# Altium PCB 飞控-REV.PcbDoc
Units mil, origin at the board's own origin, x right, y up, seen from the top; angles counter-clockwise.
Board outline 1771.65 x 1322.83 mil, 4 copper layers (Top Layer, GND, VCC, Bottom Layer), stack 30.634 mil thick; 76 components, 111 nets, 377 pads, 138 vias.
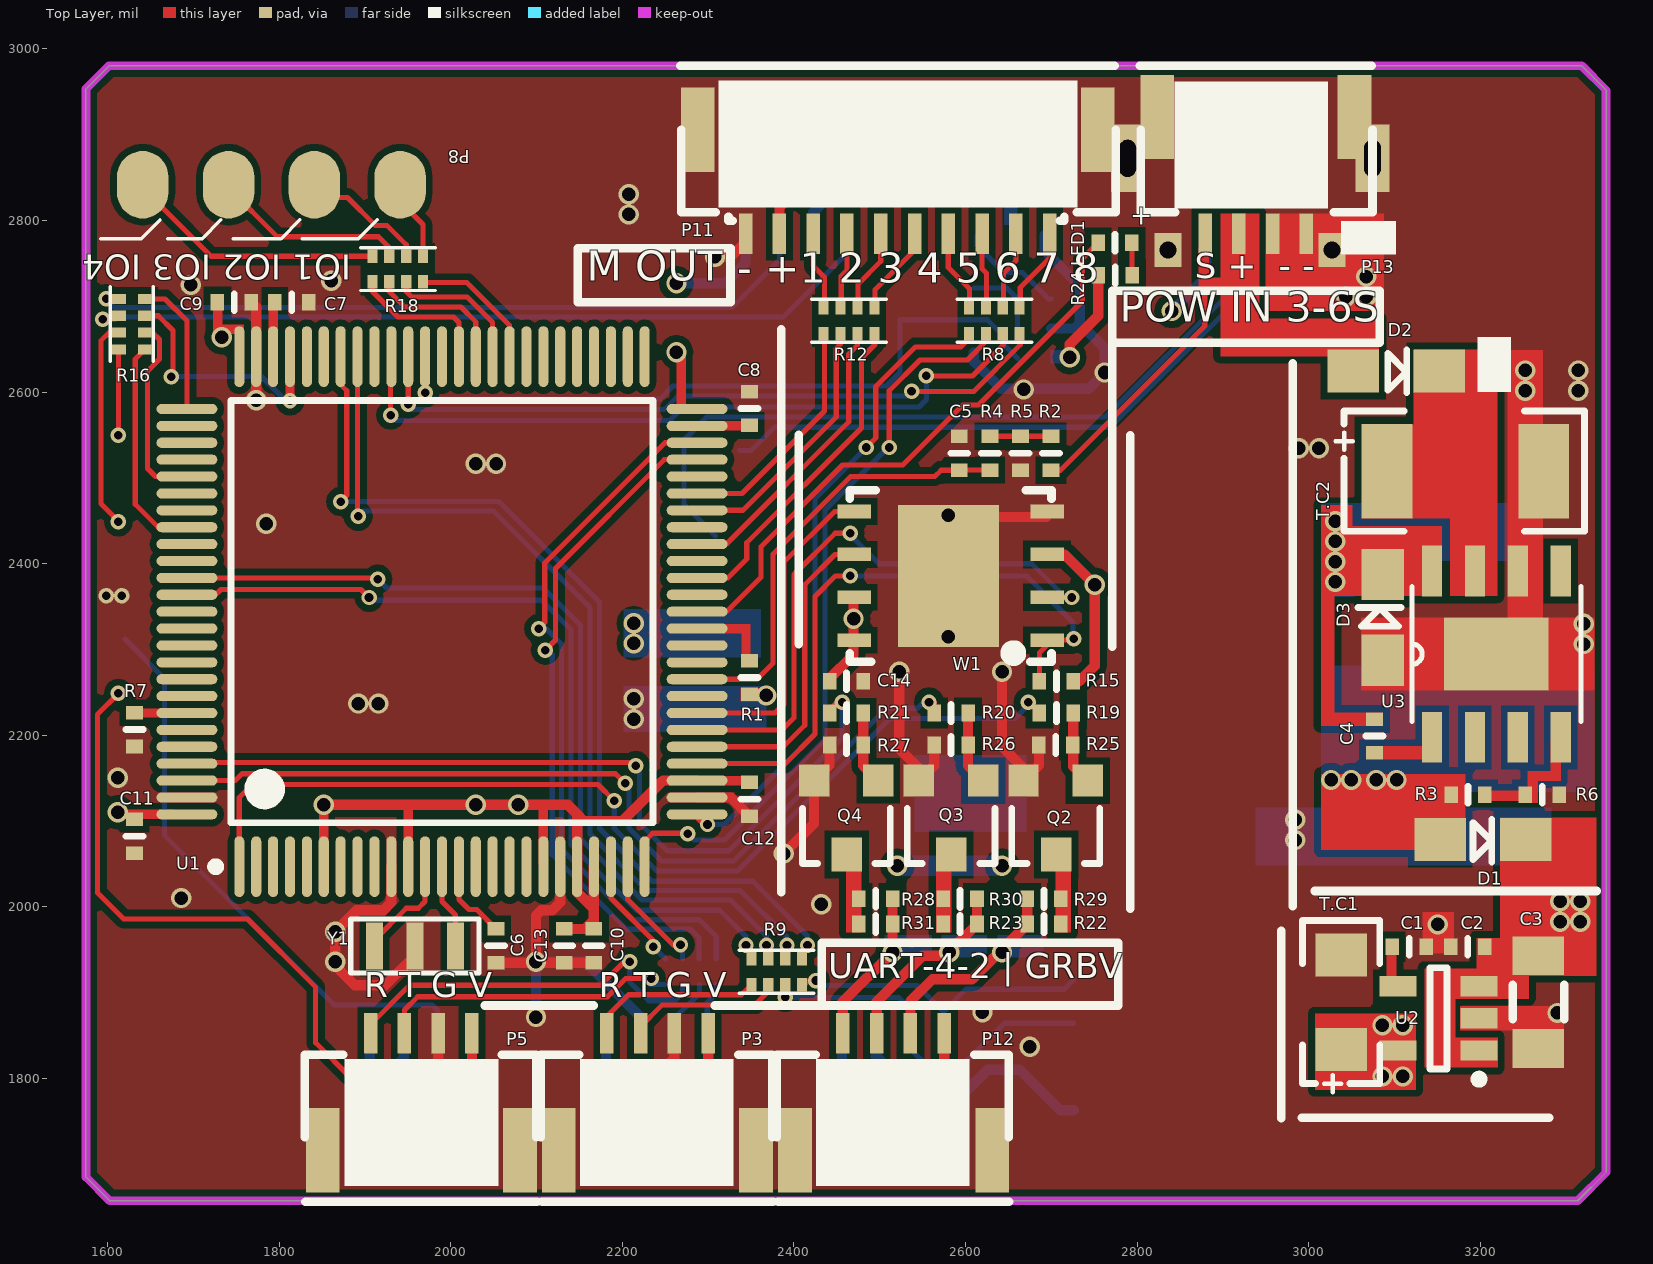
[diagram p0: Top Layer view]
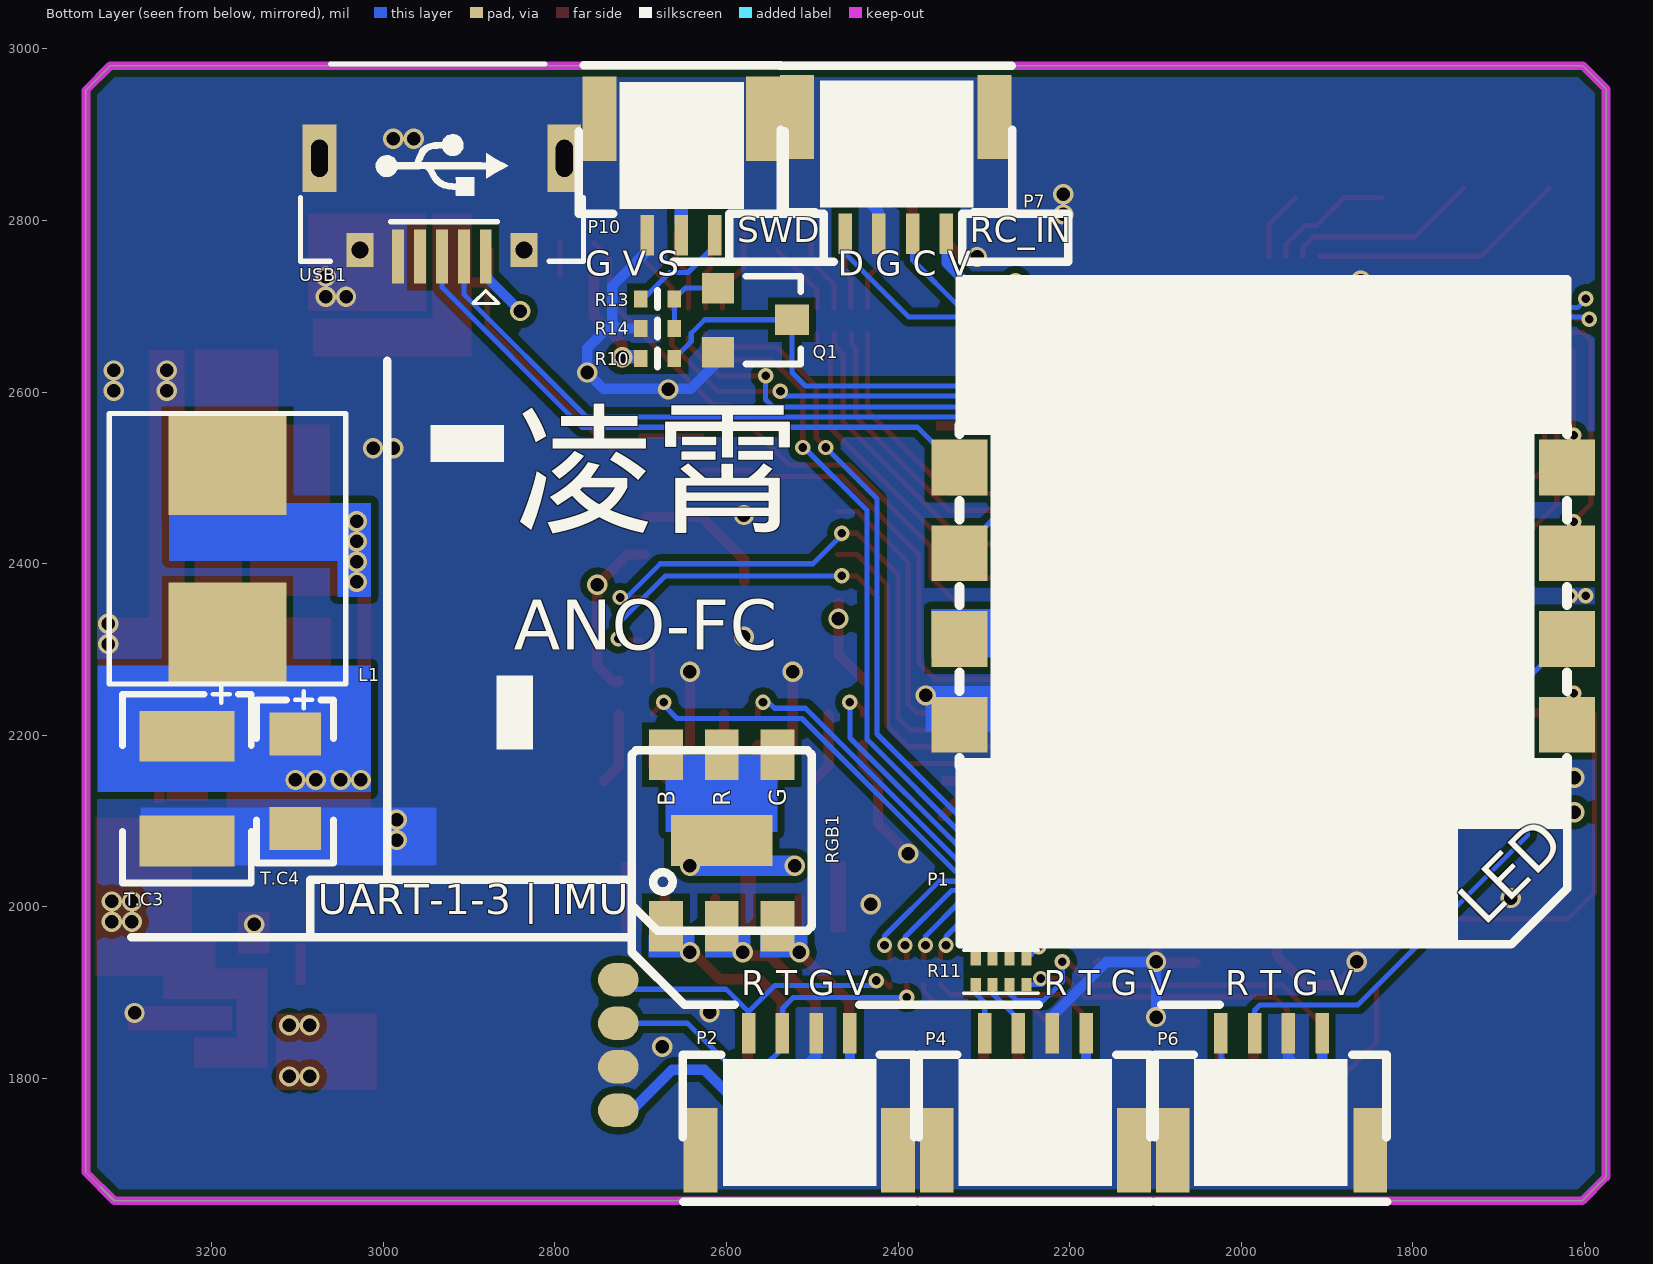
[diagram p1: Bottom Layer view, seen from below]
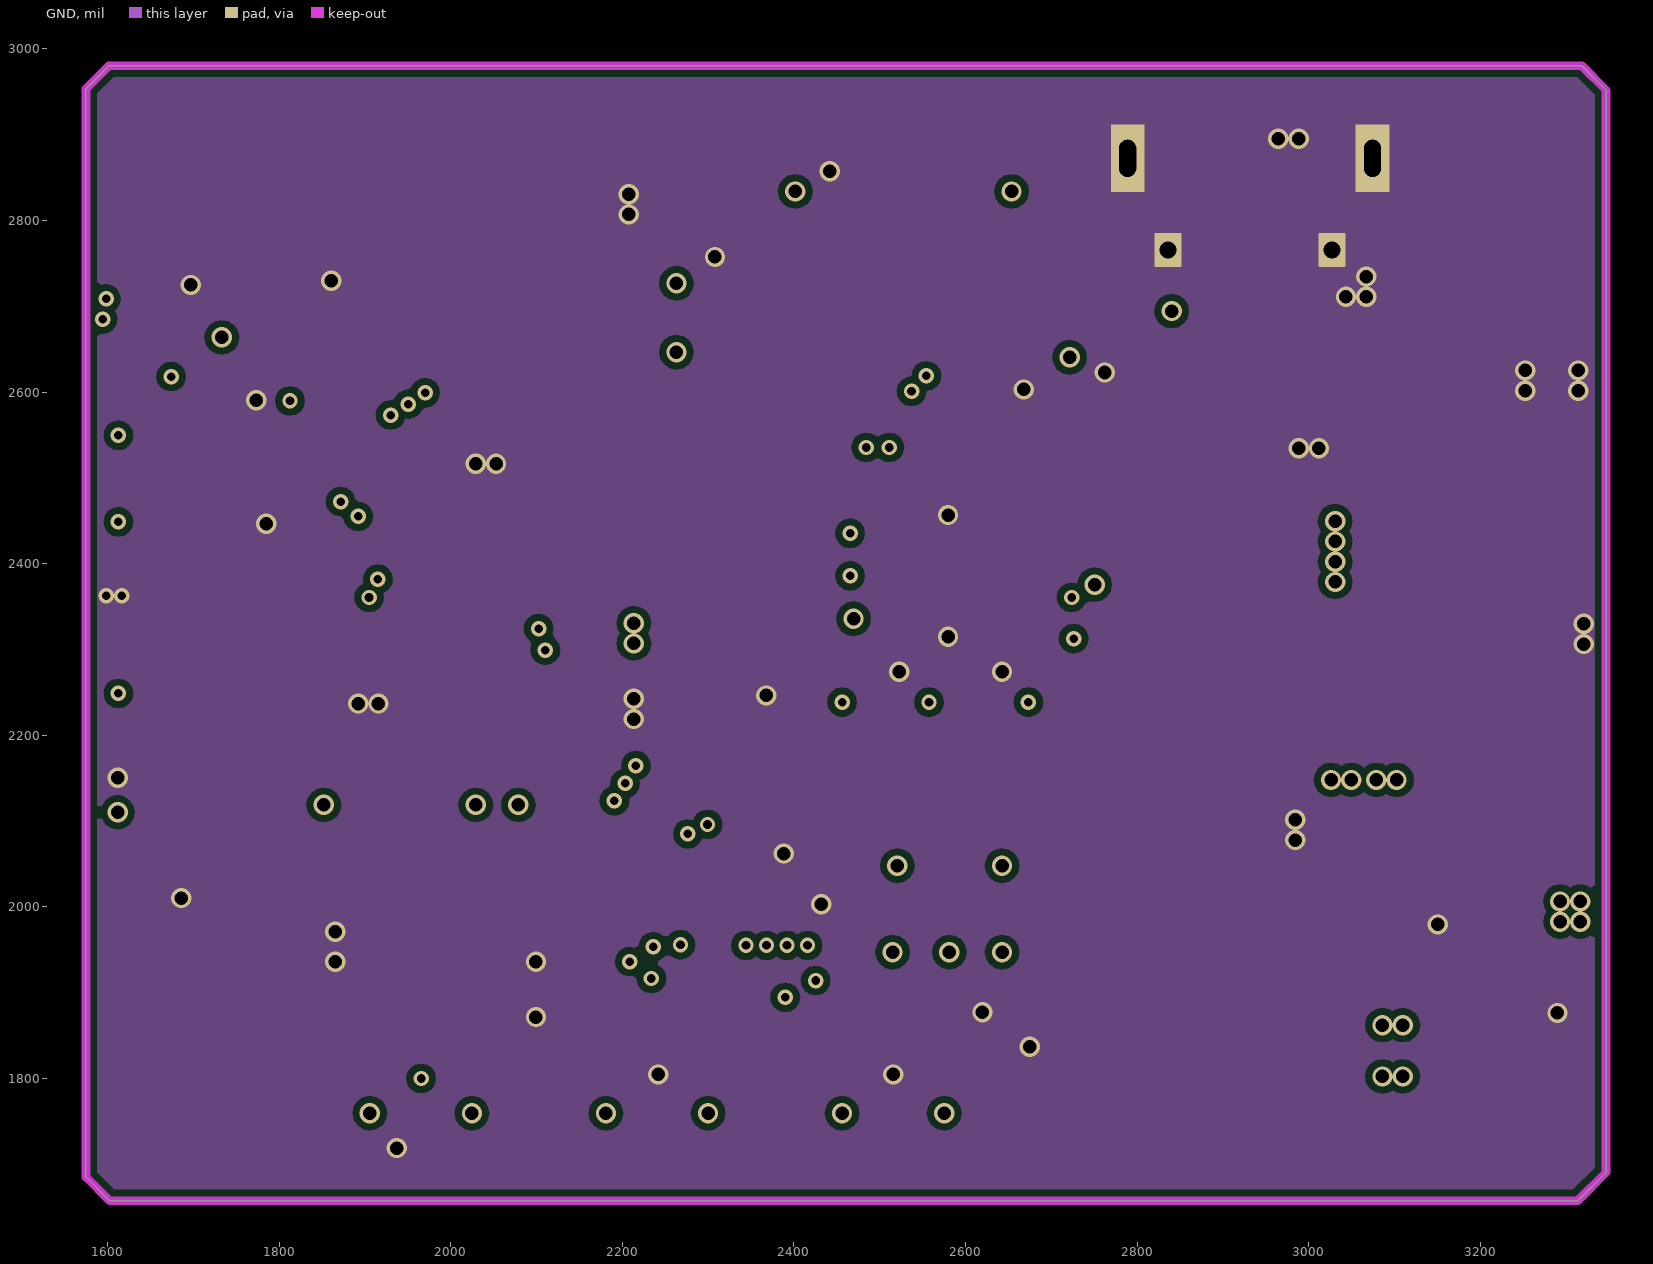
[diagram p2: GND]
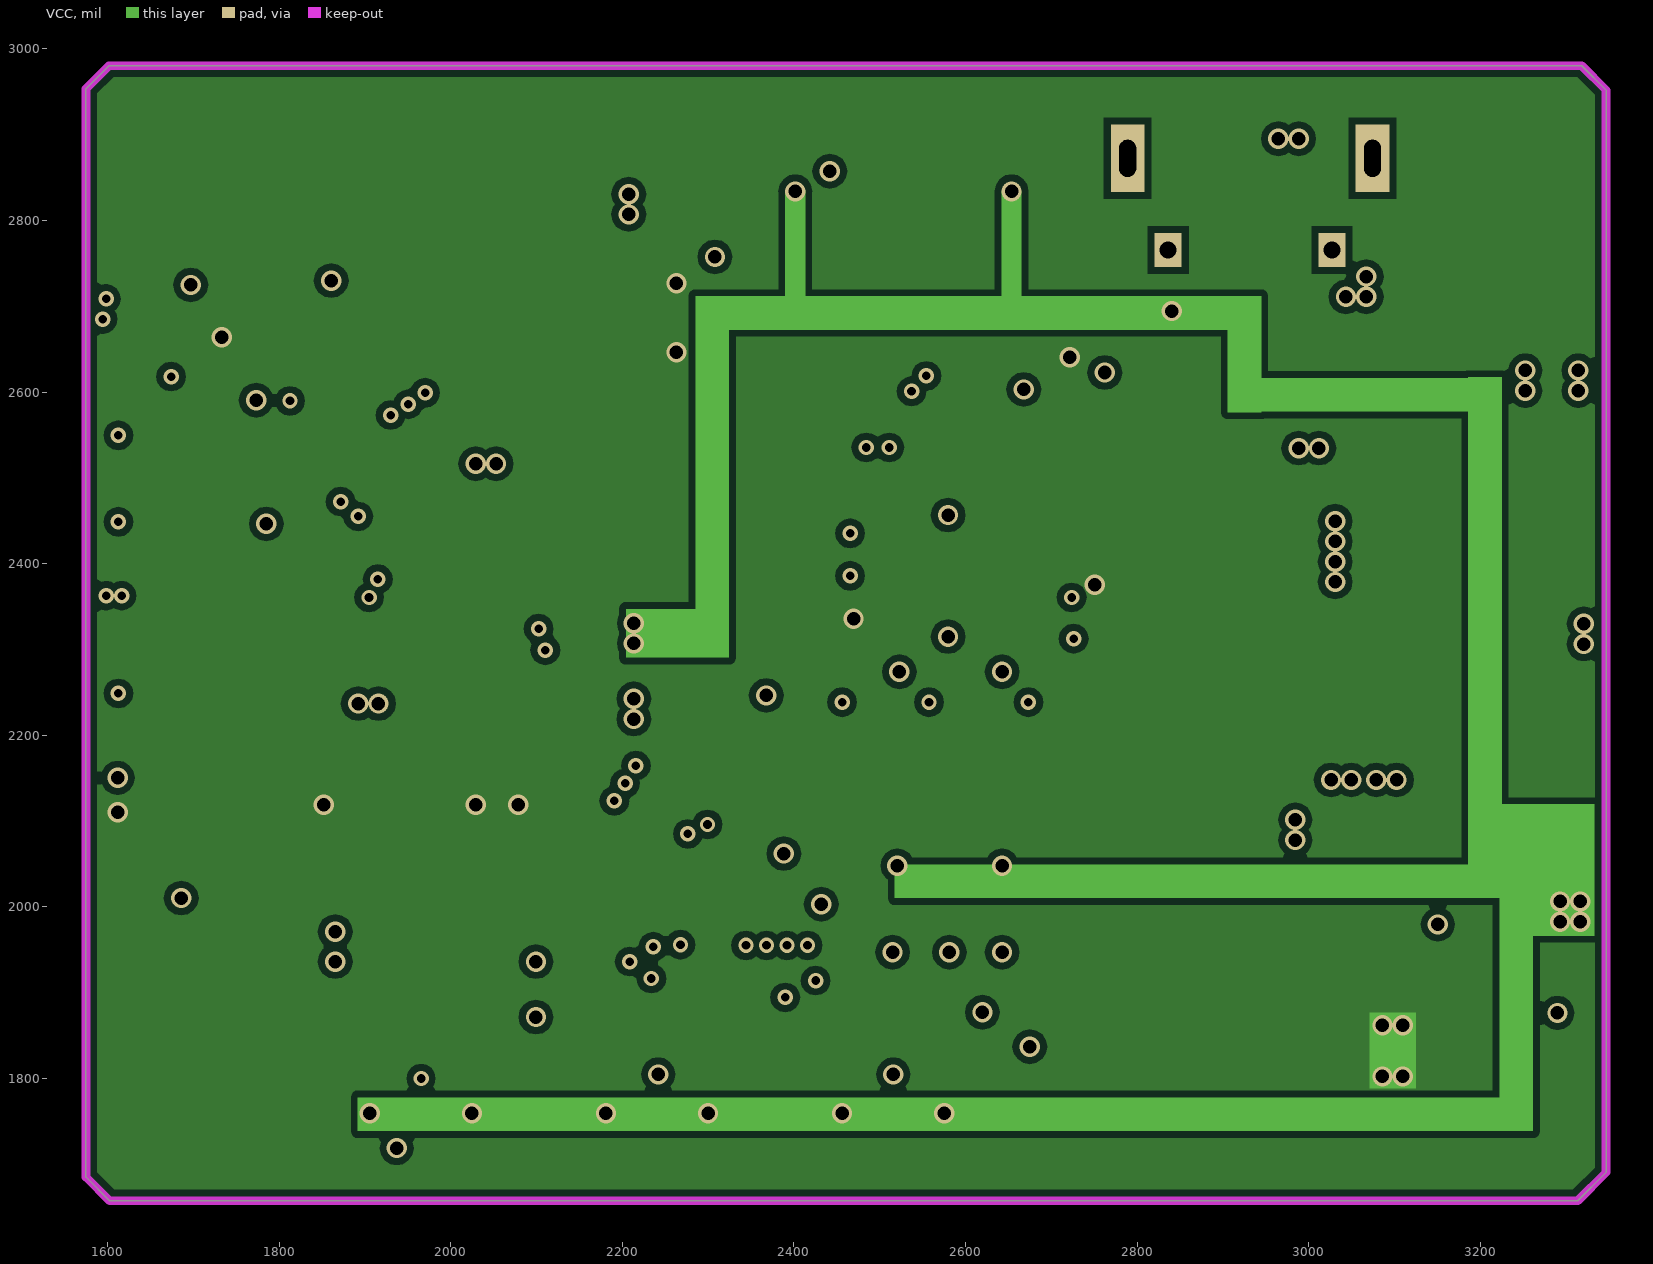
[diagram p3: VCC]
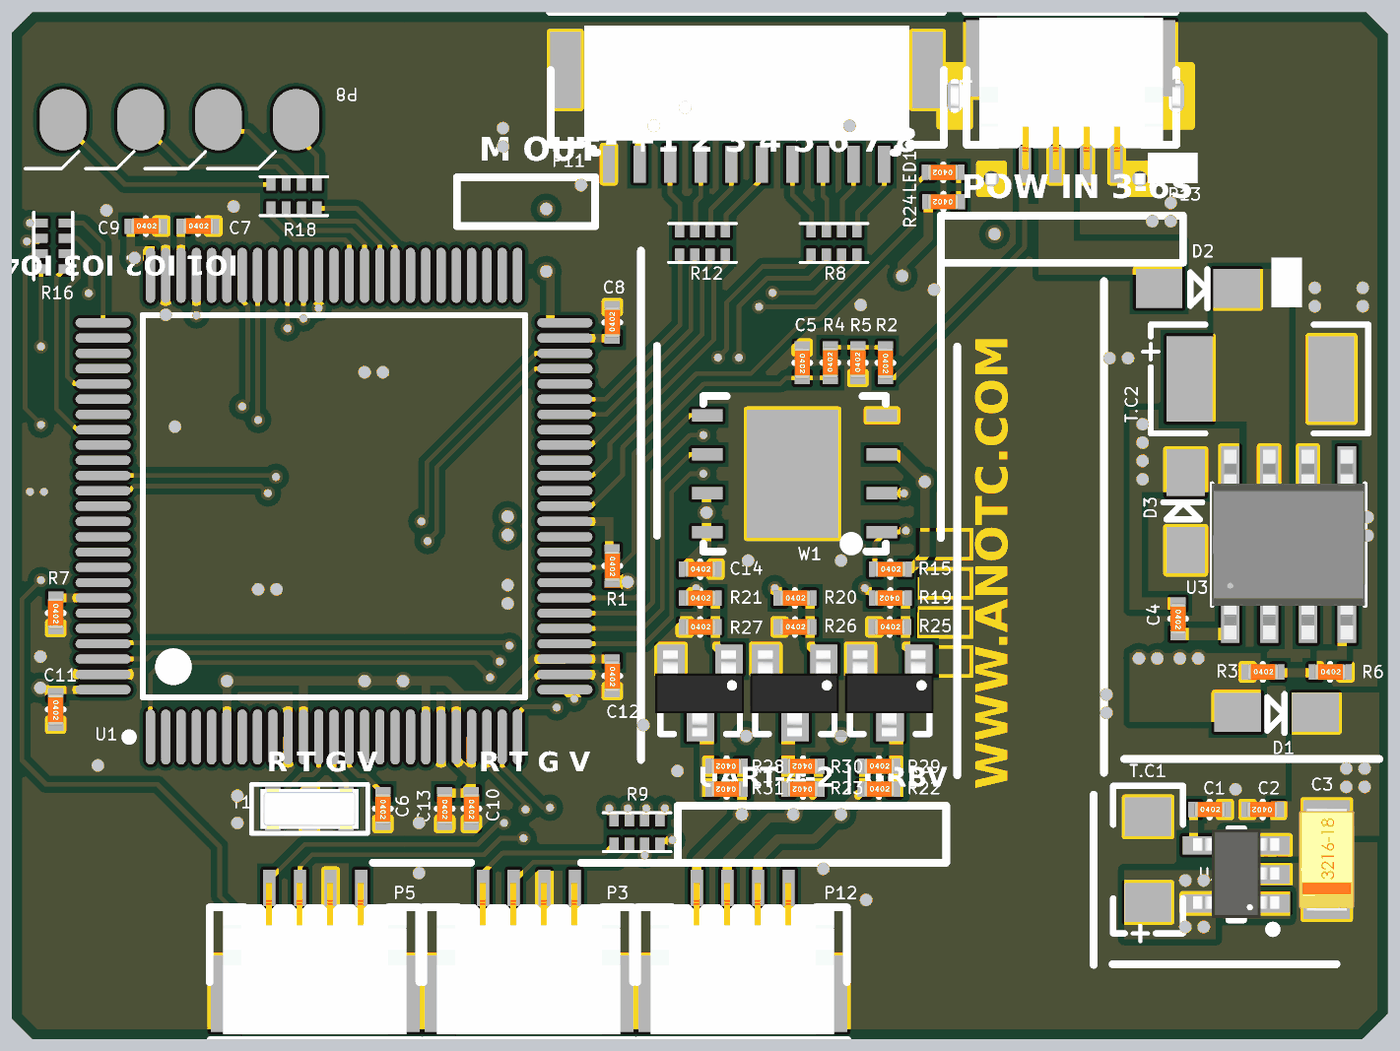
[diagram p4: 3D render of the assembled board from above, using the file's embedded part models]
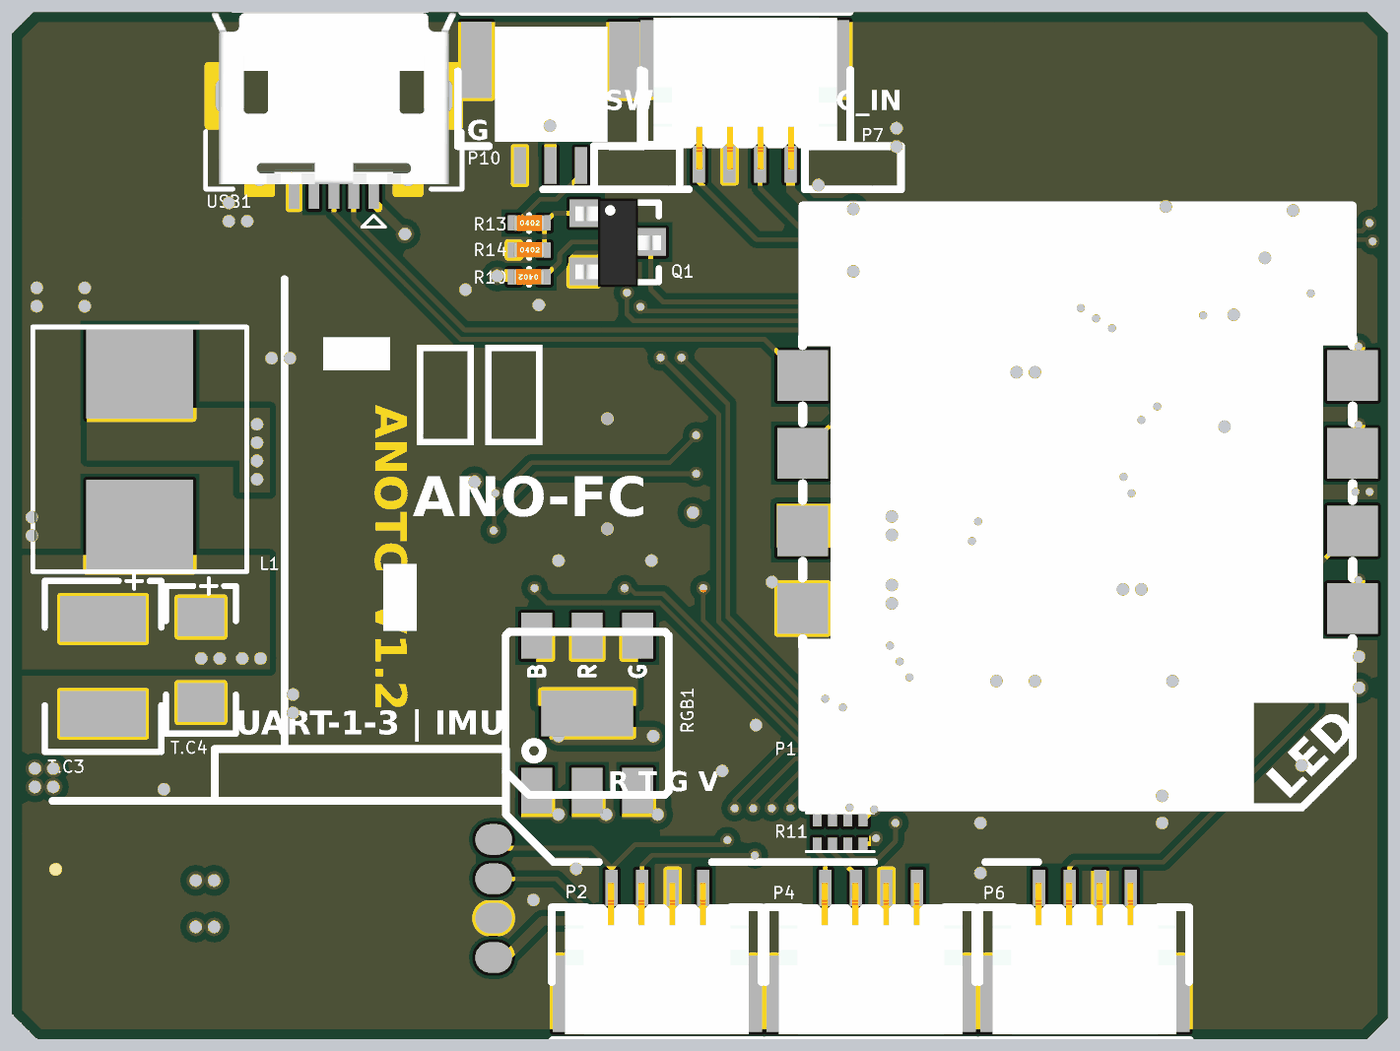
[diagram p5: 3D render of the assembled board from below, using the file's embedded part models]

## Layer stack, top to bottom
Top Solder: solder mask 0.4, Solder Resist, Dk 3.5
Top Layer: signal copper 1.4
Dielectric 1: core 10, FR-4, Dk 4.2
GND: signal copper 1.417
Dielectric 3: prepreg 5, Dk 4.2
VCC: signal copper 1.417
Dielectric 2: core 10, Dk 4.2
Bottom Layer: signal copper 1.4
Bottom Solder: solder mask 0.4, Solder Resist, Dk 3.5

## Board outline
1574.8,1685.04 1574.8,2953.54 1601.57,2980.32 3318.11,2980.32 3346.46,2951.97 3346.46,1690.56 3313.39,1657.48 1602.36,1657.48

## Design rules (kind name [scope] priority, off if disabled: settings)
Clearance Clearance_1 [InPolygon] p1: gap=8
Clearance [All] p2: gap=5
ComponentClearance [All] p1: gap=0 collisioncheckmode=3 verticalgap=0 showdistances=FALSE
HoleSize [All] p1: absolutevalues=TRUE maxlimit=196.85 minlimit=1 maxpercent=80.000 minpercent=20.000
HoleToHoleClearance [All] p1: gap=5 allowstackedmicrovias=TRUE
MinimumSolderMaskSliver [All] p1: minsoldermaskwidth=1
PlaneClearance [All] p1: clearance=10
PlaneConnect [All] p1: planeconnectstyle=Direct reliefexpansion=20 reliefentries=4 reliefconductorwidth=10 reliefairgap=10
PolygonConnect [All] p1: connectstyle=Direct reliefconductorwidth=10 reliefentries=4 polygonreliefangle="90 Angle" airgapwidth=10
RoutingVias [All] p1: holewidth=10 width=18 viastyle="Through Hole" minholewidth=10 minwidth=18 maxholewidth=28 maxwidth=50
SilkToSilkClearance [All] p1: silktosilkclearance=0
SilkToSolderMaskClearance [IsPad] p1: minsilkscreentomaskgap=0 clearancetoexposedcopper=TRUE
SolderMaskExpansion [All] p1: expansion=4
Width [All] p1: maxlimit=100 minlimit=4 preferedwidth=5
22 further rules are at their usual default settings.

## Classes and differential pairs
component class 飞控: C1 C2 C3 C4 C5 C6 C7 C8 C9 C10 C11 C12 C13 C14 D1 D2 D3 L1 LED1 P1 P2 P3 P4 P5 P6 P7 P10 Q1 Q2 Q3 Q4 R1 R2 R3 R4 R5 R6 R7 R8 R9 R10 R11 R12 R13 R14 R15 R16 R18 R19 R20 R21 R22 R23 R24 R25 R26 R27 R28 R29 R30 R31 RGB1 T.C1 T.C2 T.C3 T.C4 U1 U2 U3 USB1 W1 Y1

## Components (designator, comment, footprint, x,y, rotation, side; value= is the part's Value field where it differs from the comment)
C1 "0.1uf50v" 0402_small 3117.32,1953.54 r0 top
C2 "0.1uf50v" 0402_small 3185.04,1953.54 r180 top
C3 "4.7uf16v" 1206_C 3267.72,1888.98 r270 top
C4 "10nf50v" 0402_small 3076.38,2198.82 r270 top
C5 "0.1uf50v" 0402_small 2592.6,2528.35 r270 top
C6 "0.1uf50v" 0402_small 2052.76,1954.33 r270 top
C7 "0.1uf50v" 0402_small 1814.96,2704.72 r0 top
C8 "0.1uf50v" 0402_small 2348.03,2581.1 r90 top
C9 "0.1uf50v" 0402_small 1748.03,2704.72 r0 top
C10 "0.1uf50v" 0402_small 2166.67,1954.31 r270 top
C11 "0.1uf50v" 0402_small 1631.49,2082.04 r270 top
C12 "0.1uf50v" 0402_small 2348.03,2125.2 r270 top
C13 "0.1uf50v" 0402_small 2132.28,1954.33 r270 top
C14 "1uf10v" 0402_small 2461.42,2263 r0 top
D1 "IN5822" 0805 3153.15,2078.74 r0 top
D2 "IN5822" 0805 3051.97,2624.41 r0 top
D3 "IN5822" 0805 3086.22,2287.4 r90 top
L1 "CD54‐22uH  2A" L-8X7mm-S 3181.5,2417.32 r90 bottom
LED1 "red" 0402_small 2773.81,2774.02 r180 top
P1 "IMU_LX" IMU-LX-SM 1973.23,2358.27 r90 bottom
P2 "usart1" SH_1.0_卧 2399.66,1724.41 r0 bottom
P3 "usart2" SH_1.0_卧 2356.3,1724.41 r180 top
P4 "usart3" SH_1.0_卧 2124.46,1724.41 r0 bottom
P5 "usart4" SH_1.0_卧 2081.1,1724.41 r180 top
P6 "usart5" SH_1.0_卧 1849.27,1724.41 r0 bottom
P7 "Header" SH_1.0_卧 2518.11,2912.6 r180 bottom
P8 "Comment" HEADER_1X4_T 1940.94,2841.73 r180 top
P10 "SBUS" SH_1.0_3P卧 2746.46,2911.81 r180 bottom
P11 "Comment" "SH1.0-10P 卧" 2267.72,2980.6 r0 top
P12 "Comment" SH_1.0_卧 2631.5,1724.41 r180 top
P13 "Comment" SH_1.0_卧 2822.83,2912.6 r0 top
Q1 "si2310" SOT-23 2556.69,2684.25 r270 bottom
Q2 "si2310" SOT-23 2705.51,2094.09 r180 top
Q3 "si2310" SOT-23 2583.46,2094.09 r180 top
Q4 "si2310" SOT-23 2461.42,2094.09 r180 top
R1 "10k" 0402_small 2348.03,2266.93 r270 top
R2 "10k 1%" 0402_small 2699.61,2528.35 r270 top
R3 "50k" 0402_small 3185.83,2130.71 r0 top
R4 "1k" 0402_small 2628.6,2529.13 r90 top
R5 "1k 1%" 0402_small 2664.16,2528.99 r90 top
R6 "15k" 0402_small 3272.44,2130.71 r0 top
R7 "10k" 0402_small 1631.5,2206.3 r270 top
R8 "1k 排阻" 4D02 2662.96,2668.04 r180 top
R9 "1k 排阻" 4D02 2350.39,1939.37 r0 top
R10 "10K" 0402_small 2680.56,2639.37 r0 bottom
R11 "1k 排阻" 4D02 2309.45,1939.37 r180 bottom
R12 "1k 排阻" 4D02 2493.67,2668.04 r180 top
R13 "1K" 0402_small 2679.92,2708.66 r180 bottom
R14 "10K" 0402_small 2679.92,2674.02 r180 bottom
R15 "4.7k" 0402_small 2706.15,2263 r0 top
R16 "1k 排阻" 4D02 1643.31,2708.66 r270 top
R18 "1k 排阻" 4D02 1967.72,2728.35 r180 top
R19 "1k" 0402_small 2705.51,2225.78 r180 top
R20 "1k" 0402_small 2583.46,2225.79 r0 top
R21 "1k" 0402_small 2461.42,2225.79 r0 top
R22 "50" 0402_small 2691.73,1979.92 r0 top
R23 "50" 0402_small 2593.31,1979.92 r180 top
R24 "1k" 0402_small 2774.02,2736.22 r180 top
R25 "10K" 0402_small 2705.51,2188.58 r0 top
R26 "10K" 0402_small 2583.46,2188.58 r0 top
R27 "10K" 0402_small 2461.42,2188.58 r0 top
R28 "50" 0402_small 2494.88,2009.45 r180 top
R29 "50" 0402_small 2691.73,2009.45 r0 top
R30 "50" 0402_small 2593.31,2009.44 r180 top
R31 "50" 0402_small 2494.88,1979.92 r180 top
RGB1 "RGB-LED" zhuixin_5050RGB 2705.51,1972.44 r90 bottom
T.C1 "10uf16V" TAN-A(3216-18) 3037.8,1888.98 r270 top
T.C2 "100uf35V" TAN-C(6032-28) 3178.74,2507.87 r270 top
T.C3 "47uf16V" TAN-B(3528-21) 3228.74,2137.8 r0 bottom
T.C4 "10uf16V" TAN-A(3216-18) 3102.76,2146.31 r90 bottom
U1 "STM32F407V" LQFP100_N 1989.76,2344.09 r90 top
U2 "MIC5219" SOT23-5 3151.18,1870.08 r180 top
U3 "TPS5430" R-PDSO-G8 3123.62,2294.58 r90 top
USB1 "MINI_USB" MICROUSB2 3086.61,2872.44 r270 bottom
W1 "W25Q32FVZPIG" 8-WSON 2582.68,2385.83 r90 top
Y1 "贴片小晶振" XTAL_3P 1911.02,1954.33 r0 top

## Footprints (in the part's own frame and the unit in brackets; to place one, negate y for a bottom-side part, rotate by r counter-clockwise, add the part's x,y. Pads: shape width x height; smd on the part's side, far side on the other; paste and mask are expansions set on the pad)
4D02 [mm]
  rect 0.3x0.4 smd: 1(0,0) 2(0.5,0) 3(1,0) 4(1.5,0) 5(0,-0.762) 6(0.5,-0.762) 7(1,-0.762) 8(1.5,-0.762)
  silkscreen extent -0.36,-1.02 1.85,0.25
8-WSON [mm]
  rect 4.2x3 smd: 0(0,0.064)
  rect 0.4x1 smd: 1(-1.905,-2.857) 2(-0.635,-2.857) 3(0.635,-2.857) 4(1.905,-2.857) 5(1.905,2.857) 6(0.635,2.857) 7(-0.635,2.857) 8(-1.905,2.857)
  silkscreen extent -2.54,-2.98 2.54,2.98, body extent -2.54,-2.98 2.54,2.98, height 1.02
0402_small [mm]
  rect 0.4x0.5 smd: 1(-0.508,0) 2(0.492,0)
  silkscreen extent -0.01,-0.25 -0.01,0.25, body extent -0.51,-0.25 0.51,0.25, height 0.51
0805 [mil]
  rect 60x50 smd: 1(0,0) 2(100,0)
1206_C [mil]
  rect 45x60 smd: 1(-54,0) 2(54,0)
  silkscreen extent -20,-30 20,30, body extent -67,-35 67,35, height 71
HEADER_1X4_T [mil]
  oval 60x78.74 smd: 1(0,0) 2(100,0) 3(200,0) 4(300,0)
IMU-LX-SM [mil]
  rect 65x65 smd: 1(-146,355) 2(-46,355) 3(54,355) 4(154,355) 5(154,-353) 6(54,-353) 7(-46,-353) 8(-146,-353)
  silkscreen extent -402,-353 374,356
L-8X7mm-S [mm]
  rect 3x3.5 smd: 1(-2.5,0) 2(2.5,0)
  silkscreen extent -4,-3.5 4,3.5, body extent -2.79,-2.67 2.92,2.53, height 4.5
LQFP100_N [mm]
  oval 1.8x0.3 smd: 1(-7.55,6) 2(-7.55,5.5) 3(-7.55,5) 4(-7.55,4.5) 5(-7.55,4) 6(-7.55,3.5) 7(-7.55,3) 8(-7.55,2.5) 9(-7.55,2) 10(-7.55,1.5) 11(-7.55,1) 12(-7.55,0.5) 13(-7.55,0) 14(-7.55,-0.5) 15(-7.55,-1) 16(-7.55,-1.5) 17(-7.55,-2) 18(-7.55,-2.5) 19(-7.55,-3) 20(-7.55,-3.5) 21(-7.55,-4) 22(-7.55,-4.5) 23(-7.55,-5) 24(-7.55,-5.5) 25(-7.55,-6) 51(7.55,-6) 52(7.55,-5.5) 53(7.55,-5) 54(7.55,-4.5) 55(7.55,-4) 56(7.55,-3.5) 57(7.55,-3) 58(7.55,-2.5) 59(7.55,-2) 60(7.55,-1.5) 61(7.55,-1) 62(7.55,-0.5) 63(7.55,0) 64(7.55,0.5) 65(7.55,1) 66(7.55,1.5) 67(7.55,2) 68(7.55,2.5) 69(7.55,3) 70(7.55,3.5) 71(7.55,4) 72(7.55,4.5) 73(7.55,5) 74(7.55,5.5) 75(7.55,6)
  oval 0.3x1.8 smd: 26(-6,-7.55) 27(-5.5,-7.55) 28(-5,-7.55) 29(-4.5,-7.55) 30(-4,-7.55) 31(-3.5,-7.55) 32(-3,-7.55) 33(-2.5,-7.55) 34(-2,-7.55) 35(-1.5,-7.55) 36(-1,-7.55) 37(-0.5,-7.55) 38(0,-7.55) 39(0.5,-7.55) 40(1,-7.55) 41(1.5,-7.55) 42(2,-7.55) 43(2.5,-7.55) 44(3,-7.55) 45(3.5,-7.55) 46(4,-7.55) 47(4.5,-7.55) 48(5,-7.55) 49(5.5,-7.55) 50(6,-7.55) 76(6,7.55) 77(5.5,7.55) 78(5,7.55) 79(4.5,7.55) 80(4,7.55) 81(3.5,7.55) 82(3,7.55) 83(2.5,7.55) 84(2,7.55) 85(1.5,7.55) 86(1,7.55) 87(0.5,7.55) 88(0,7.55) 89(-0.5,7.55) 90(-1,7.55) 91(-1.5,7.55) 92(-2,7.55) 93(-2.5,7.55) 94(-3,7.55) 95(-3.5,7.55) 96(-4,7.55) 97(-4.5,7.55) 98(-5,7.55) 99(-5.5,7.55) 100(-6,7.55)
  silkscreen extent -7.67,-6.25 6.25,6.82
MICROUSB2 [mm]
  rect 1.6x0.35 smd: 1(2.9,5.237) 2(2.9,4.587) 3(2.9,3.937) 4(2.9,3.287) 5(2.9,2.637)
  rect 2x1 hole 0.5 slot 1.1 at 0 deg: 5(0,0.312) 5(0,7.562)
  rect 1x0.8 hole 0.5: 5(2.71,1.512) 5(2.71,6.362)
  silkscreen extent -2.79,-0.25 4.3,8.13, body extent -2.71,-0.06 2.89,7.94, height 2.8
R-PDSO-G8 [mil]
  rect 59.06x23.62 smd: 1(-97,-20) 2(-97,-70) 3(-97,-120) 4(-97,-170) 5(97,-170) 6(97,-120) 7(97,-70) 8(97,-20)
  rect 85x122 smd paste-60.5: 9(0,-95)
  silkscreen extent -78,-194 79,4, body extent -122,-194 122,4, height 67
"SH1.0-10P 卧" [mm]
  rect 1x2.5 smd: 0(0.508,-1.9) 0(12.35,-1.9)
  rect 0.4x1.2 smd: 1(1.929,-4.981) 2(2.929,-4.981) 3(3.929,-4.981) 4(4.929,-4.981) 5(5.929,-4.981) 6(6.929,-4.981) 7(7.929,-4.981) 8(8.929,-4.981) 9(9.929,-4.981) 10(10.929,-4.981)
  silkscreen extent 0,-4.6 12.88,0
SH_1.0_3P卧 [mm]
  rect 1x2.5 smd: 0(-0.039,0.178) 0(4.803,0.178)
  rect 0.4x1.2 smd: 1(1.381,-3.279) 2(2.381,-3.279) 3(3.381,-3.279)
  silkscreen extent -0.65,-2.64 5.45,1.75
SH_1.0_卧 [mm]
  rect 0.4x1.2 smd: 1(1.432,-3.254) 2(2.432,-3.254) 3(3.432,-3.254) 4(4.432,-3.254)
  rect 1x2.5 smd: 5(0.011,0.203) 5(5.853,0.203)
  silkscreen extent -0.5,-2.62 6.39,1.73, body extent -0.05,-3.43 5.95,1.53, height 3.14
SOT23-5 [mm] "SOT23, 5-Leads, Body 3.0x3.0mm (max), Pitch 0.95mm, IPC Medium Density"
  rect 1.1x0.6 smd: 1(-1.2,0.95) 2(-1.2,0) 3(-1.2,-0.95) 4(1.2,-0.95) 5(1.2,0.95)
  silkscreen extent -1.33,-1.5 0.25,1.92, body extent -1.41,-1.47 1.41,1.43, height 1.45
SOT-23 [mm]
  rect 0.9x0.95 smd: 1(-0.94,-1.346) 2(0.965,-1.346)
  rect 0.9x1 smd: 3(0,0.838)
  silkscreen extent -1.29,-0.52 1.31,1.1, body extent -1.42,-1.63 1.48,1.17, height 1.3
TAN-A(3216-18) [mil]
  rect 50x60 smd: 1(55,0) 2(-55,0)
  silkscreen extent -95,-45 105,45, body extent -75,-30 75,30, height 39
TAN-B(3528-21) [mm]
  rect 2.8x1.5 smd: 1(0,-1.55) 2(0,1.55)
  silkscreen extent -1.9,-3.05 1.91,2.79
TAN-C(6032-28) [mm]
  rect 2.8x1.5 smd: 1(0,-2.222) 2(0,2.413)
  silkscreen extent -1.78,-3.75 1.78,3.62
XTAL_3P [mm] "XTAL"
  rect 0.5x1.4 smd: 1(0,0) 2(2.4,0) 3(1.2,0)
  silkscreen extent -0.7,-0.8 3.1,0.8, body extent -0.4,-0.65 2.8,0.65, height 0.7
zhuixin_5050RGB [mm]
  rect 1.5x3 smd: 0(2.667,-2.54)
  rect 1.5x1 smd: 1(5.203,-4.191) 2(0.131,-4.191) 3(5.203,-2.54) 4(0.131,-2.54) 5(5.203,-0.889) 6(0.131,-0.889)
  silkscreen extent 0,-5.21 5.33,0.13

## Part data
C1 C2 C3 C5 C6 C7 C8 C9 C10 C11 C12 C13 C14: library part "Cap Semi", "Capacitor (Semiconductor SIM Model)"
C4: library part CAP_0402
D1 D2 D3: library part IN5822-SS34, "肖特基二极管"
L1: library part L
LED1: library part D-LED, "LED"
P2 P3 P4 P5 P6 P7: library part "Header 4", "Header, 4-Pin"
P10: library part HEADER_3P
Q1 Q2 Q3 Q4: library part "MOSFET N"
R1 R2 R3 R4 R5 R6 R7 R10 R13 R14 R15 R19 R20 R21 R22 R23 R24 R25 R26 R27 R28 R29 R30 R31: library part Res, "Resistor"
R8 R9 R11 R12 R16 R18: library part RES*4
T.C1 T.C2 T.C3 T.C4: library part "Cap TAN", "TAN Capacitor (Radial)"
U1: library part STM32F407VG, "STM32 ARM-based 32-bit MCU with 1024 Kbytes Flash, 100-pin LQFP, Industrial Temperature"
U2: library part MIC5205, "MIC5205ͬTPS79330"
U3: "9脚与地连接"
Y1: library part "XTAL 贴片小"

## Free pads (board coordinates)
  oval 47.24x39.37 smd far side: 0(2725.98,1762.99) 1(2725.98,1813.65) 2(2725.98,1864.3) 3(2725.98,1914.96)

## Via types
v1: diameter 23.62, hole 15.75, Top Layer to Bottom Layer, tented both sides, 93 vias
v2: diameter 18, hole 10, Top Layer to Bottom Layer, tented both sides, 45 vias

## Nets (pads, with @x,y where several pads share a name; then routed paths per layer and width w, separated by ;. In a path a pad name is that pad's centre, name@x,y a point inside that pad or via, vN(x,y) a via of type N, cw(c..) or ccw(c..) an arc to the next point about the centre after c; other vN are vias at no path point)
ADC_IN0/TIM5_CH1/USART4_TX: 
ADC_IN1/TIM5_CH2/USART4_RX: 
BOOT0: R7.1 U1.94
BOOT1: R1.1 U1.37
G: C1.2 C2.2 C3.2 C5.1 C6.2 C7.2 C8.2 C9.2 C10.2 C11.2 C12.2 C13.2 C14.2 D3.1 P1.1 P2.2 P2.5 P3.2 P3.5 P4.2 P4.5 P5.2 P5.5 P6.2 P6.5 P7.2 P7.5 P10.0 P10.1 P11.0 P11.1 P12.5 P13.3 P13.4 P13.5 pad.1 Q1.2 Q2.2 Q3.2 Q4.2 R1.2 R5.1 R6.2 R7.2 R14.1 R25.1 R26.1 R27.1 T.C1.2 T.C2.2 T.C3.2 T.C4.2 U1.10 U1.20 U1.27 U1.74 U1.99 U2.2 U3.6 U3.9 USB1.5 W1.0 W1.4 Y1.3 | length 2586.6
  Top Layer w12: C9.2 1773.23,2698.89 v1(1773.23,2590.55) ; U1.10 1930.71,2005.51 1921.26,1996.06 1890.35,1996.06 v1(1865.35,1971.06) v1(1865.35,1936.22) 1865.35,1931.5 1888.19,1908.66 1923.51,1908.66 1937.51,1922.66 1937.62,1922.66 1958.27,1943.31 Y1.3 ; v1(1937.01,1718.9) 1997.64,1779.53 1997.64,1805.51 1985.34,1817.81 P5.2 ; C6.2@2052.77,1934.95 C10.2 ; v1(2099.21,1936.22) 2099.21,1989.76 2105.51,1996.06 2118.11,1996.06 2127.56,2005.51 U1.20 ; v1(2241.73,1804.72) 2260.54,1823.53 P3.2 ; U1.27 2326.3,2127.56 C12.2 ; v1(2307.87,2757.48) 2326.26,2757.48 2343.66,2774.88 P11.1 ; v1(2388.19,2062.2) 2423.42,2097.43 Q4.2 2441.41,2165.09 R27.1 ; v1(2522.83,2274.02) 2522.83,2184.25 2545.46,2161.62 Q3.2 2563.46,2165.09 R26.1 ; W1.0@2579.39,2379.53 2579.39,2404.59 2629.33,2454.53 W1.4@2694.39,2454.53 ; v1(2642.52,2274.02) 2642.52,2186.61 2667.51,2161.62 Q2.2 2685.51,2165.09 R25.1
  Bottom Layer w12: v1(1937.01,1718.9) 1937.01,1815.75 1945.03,1823.77 P6.2 ; v1(2099.21,1871.65) v1(2099.21,1936.22) 2156.69,1936.22 2220.22,1872.69 P4.2 ; P7.2 2422.35,2809.75 2441.73,2829.13 v1(2441.73,2857.48) ; P2.2 2495.42,1826.63 v1@2517.32,1804.72 ; Q1.2 2609.69,2635.98 2641.73,2603.94 2743.31,2603.94 v1(2762.2,2622.83) 2762.2,2651.18 2733.07,2680.32 ; P10.1 2692.07,2764.63 2733.07,2723.62 2733.07,2680.32 ; R14.1 2726.77,2674.02 2733.07,2680.32
  other v1: 2515.75,1804.72 2674.8,1837.01 3289.76,1876.38 2619.68,1877.17 3150.39,1979.53 2431.83,2003.14 1685.83,2010.24 2984.25,2077.95 2984.25,2101.57 1611.81,2150.39 2213.39,2218.9 1892.13,2237.01 1915.75,2237.01 2213.39,2242.52 2367.72,2246.46 3320.47,2306.3 2579.53,2314.96 3320.47,2329.92 1785.04,2446.46 2579.53,2456.69 2029.13,2516.54 2052.76,2516.54 2988.19,2534.65 3011.81,2534.65 3252.44,2601.57 3314.17,2601.57 2667.83,2603.15 3252.44,2625.2 3314.17,2625.2 3043.31,2711.02 3066.93,2711.02 1696.85,2724.93 1860.63,2729.92 3066.93,2734.65 2207.35,2807.09 2207.35,2830.71 2964.57,2895.28 2988.19,2895.28
  other v2: 1598.43,2362.67 1616.54,2362.67
IO_1: P8.1 R18.5 | length 81.5
  Top Layer w6: P8.1@1936.22,2826.77 1967.72,2795.28 R18.5
IO_2: P8.2 R18.6 | length 147.9
  Top Layer w6: P8.2@1836.22,2826.77 1879.53,2826.77 1911.94,2794.36 1925.32,2794.36 1948.03,2771.65 R18.6
IO_3: P8.3 R18.7 | length 226.3
  Top Layer w6: P8.3@1740.94,2837.8 1797.64,2781.1 1915.75,2781.1 1928.35,2768.5 R18.7
IO_4: P8.4 R18.8 | length 300.6
  Top Layer w6: P8.4@1640.94,2837.8 1720.39,2758.35 R18.8
LED_1: R21.1 U1.97 | length 965.7
  Top Layer w6: U1.97 1693.77,2168.18 2215.28,2168.18 2215.28,2165.02 v2(2215.74,2164.56) ; R21.1@2441.41,2224.01 2441.41,2230.24 2449.75,2238.58 v2(2456.05,2238.58)
  Bottom Layer w6: v2(2215.74,2164.56) 2220.15,2160.16 2220.15,2097.37 2252.17,2065.35 2324.41,2065.35 2456.05,2197 v2(2456.05,2238.58)
LED_2: R20.1 U1.98 | length 1029.7
  Top Layer w6: U1.98 1748.82,2147.24 1756.69,2155.12 2192.12,2155.12 v2(2203.15,2144.09) ; R20.1@2563.46,2224.01 v2@2563.46,2238.78
  Bottom Layer w6: v2(2203.15,2144.09) 2207.55,2139.68 2207.55,2091.66 2245.67,2053.54 2329.92,2053.54 2507.87,2231.5 2543.98,2231.5 2551.06,2238.58 v2(2557.36,2238.58)
LED_3: R19.2 U1.1 | length 1169.6
  Top Layer w6: U1.1 1753.54,2127.56 1768.5,2142.52 2171.65,2142.52 v2(2190.55,2123.62) ; v2(2673.23,2238.58) 2686.15,2225.66 R19.2@2686.15,2224.01
  Bottom Layer w6: v2(2190.55,2123.62) 2190.55,2091.34 2240.16,2041.73 2333.86,2041.73 2511.81,2219.68 2657.48,2219.68 v2@2674.8,2237.01
LED_OB: LED1.2 U1.38 | length 695.3
  Top Layer w6: U1.38 2321.26,2344.09 2361.42,2384.25 2361.42,2419.68 2456.69,2514.96 2526.72,2514.96 2596.8,2585.04 2614.96,2585.04 2736.22,2706.3 2736.22,2755.8 LED1.2
MPU_INT: U1.88
NetC1_1: C1.1 U2.4
NetC4_1: C4.1 D3.2 L1.2 U3.8
  other v1: 3030.71,2378.74 3030.71,2402.36 3030.71,2425.98 3030.71,2449.61
NetC4_2: C4.2 U3.1
NetC7_1: C7.1 U1.73
NetC8_1: C8.1 U1.49
NetD1_1: D1.1 L1.1 R3.1 T.C3.1 T.C4.1
  other v1: 3025.98,2148.03 3049.61,2148.03 3078.74,2148.03 3102.36,2148.03
NetLED1_1: LED1.1 R24.1 | length 37.6
  Top Layer w6: R24.1 LED1.1@2794.02,2773.82
NetP1_3: 
NetQ1_1: Q1.1 R13.2 R14.2 | length 90.7
  Bottom Layer w6: Q1.1 2647.96,2721.25 R13.2 R14.2
NetQ2_1: Q2.1 R19.1 R25.2 | length 84
  Top Layer w12: R19.1@2725.52,2224.01 2725.52,2164.09 Q2.1
NetQ3_1: Q3.1 R20.2 R26.2 | length 84.2
  Top Layer w12: R20.2@2602.83,2224.01 R26.2 2602.83,2164.73 Q3.1
NetQ4_1: Q4.1 R21.2 R27.2 | length 84.2
  Top Layer w12: R21.2@2480.78,2224.01 R27.2 2480.78,2164.73 Q4.1
NetR2_1: R2.1 R4.2 R5.2 | length 70.8
  Top Layer w6: R4.2 R2.1@2699.45,2548.5
NetR3_2: R3.2 R6.1 U3.4
NetU1_12: U1.12 Y1.1 | length 118.2
  Top Layer w6: Y1.1@1911.02,1961.42 1948.03,1998.43 1962.2,1998.43 1970.08,2006.3 U1.12
NetU1_13: U1.13 Y1.2 | length 99
  Top Layer w6: U1.13 1989.76,2006.3 2005.51,1990.55 Y1.2
NRST: C6.1 U1.14 | length 95.7
  Top Layer w6: U1.14 2009.45,2008.66 2021.26,1996.85 2030.23,1996.85 C6.1
OTG_FS_DM: P1.3 USB1.2 | length 876.2
  Bottom Layer w6: P1.3@2308.66,2432.28 2271.65,2469.29 2271.65,2544.09 2298.43,2570.87 2762.97,2570.87 2906.02,2713.92 USB1.2
OTG_FS_DP: P1.4 USB1.3 | length 710
  Bottom Layer w6: P1.4@2336.53,2531.99 2350.1,2531.99 2377.17,2559.06 2768.5,2559.06 2931.61,2722.17 USB1.3
POWER_INPUT: C5.2 R4.1 U1.34 | length 516.8
  Top Layer w6: U1.34 2357.05,2265.35 2375.59,2283.89 2375.59,2411.02 2466.14,2501.57 2564.13,2501.57 2571.54,2508.98 C5.2 ; C5.2@2592.74,2509.13 R4.1
PPM_IN: 
PWMIN_1: 
PWMIN_2: Q1.3 R10.1 U1.64 | length 833.8
  Top Layer w6: v2(1970.08,2599.21) U1.64
  Bottom Layer w6: v2(1970.08,2599.21) 1977.17,2592.13 2244.09,2592.13 2259.06,2607.09 2507.87,2607.09 2523.69,2622.91 Q1.3 2625.2,2684.25 2640.94,2668.5 2640.94,2658.99 R10.1
PWMIN_3: 
PWMIN_4: 
PWMOUT_1: P11.3 R12.8 | length 91.9
  Top Layer w6: P11.3 2422.4,2746.89 2435.43,2733.86 R12.8@2435.43,2698.04
PWMOUT_2: P11.4 R12.7 | length 89.2
  Top Layer w6: R12.7@2455.12,2698.04 2455.12,2735.43 2461.77,2742.09 P11.4
PWMOUT_3: P11.5 R12.6 | length 97.4
  Top Layer w6: R12.6@2474.8,2698.04 2474.8,2726.06 2501.14,2752.4 P11.5
PWMOUT_4: P11.6 R12.5 | length 86.4
  Top Layer w6: R12.5@2494.49,2698.04 2494.49,2719.33 P11.6@2540.51,2765.35
PWMOUT_5: P11.7 R8.8 | length 96.7
  Top Layer w6: P11.7 2579.88,2745.31 2604.72,2720.47 R8.8@2604.72,2698.04
PWMOUT_6: P11.8 R8.7 | length 88.6
  Top Layer w6: P11.8 2619.25,2743.74 2624.41,2738.58 R8.7@2624.41,2698.04
PWMOUT_7: P11.9 R8.6 | length 92.5
  Top Layer w6: R8.6@2644.09,2698.04 2644.09,2738.58 2658.62,2753.11 P11.9
PWMOUT_8: P11.10 R8.5 | length 100.6
  Top Layer w6: R8.5@2663.78,2698.04 2663.78,2722.05 2697.99,2756.26 P11.10
R1: Q2.3 R22.2 R29.2
R2: Q3.3 R23.2 R30.2
R3: Q4.3 R28.2 R31.2
R4: P12.2 R22.1 R29.1 RGB1.6 | length 240.3
  Top Layer w12: P12.2 2535.74,1890.07 2561.42,1915.75 2607.56,1915.75 R22.1 R29.1
  other v1: 2642.52,1947.17
R5: P12.3 R23.1 R30.1 RGB1.4 | length 220.8
  Top Layer w12: P12.3 2496.37,1889.28 2550.06,1942.98 2576.36,1942.98 R23.1 R30.1
  other v1: 2581.1,1947.17
R6: P12.4 R28.1 R31.1 RGB1.2 | length 180.9
  Top Layer w12: P12.4 2457,1889.28 v1(2514.89,1947.17) R31.1 R28.1
SBUS_IN: P10.3 R13.1 | length 124.2
  Bottom Layer w6: P10.3 2613.33,2770.92 2644.88,2739.37 2666.14,2739.37 2696.86,2708.66 R13.1
SPI1_MISO: U1.31 W1.2 | length 688.6
  Top Layer w6: U1.31 2385.83,2206.3 2400,2220.47 2400,2387.4 2448.03,2435.43 v2(2465.35,2435.43) ; W1.2@2693.41,2360.63 v2(2723.62,2360.63)
  Bottom Layer w6: v2@2465.35,2429.13 2470.08,2429.13 2499.21,2400 2677.17,2400 v2@2722.05,2355.12
SPI1_MOSI: U1.32 W1.5 | length 377.3
  Top Layer w6: U1.32 2377.95,2225.98 2388.19,2236.22 2388.19,2401.57 2447.44,2460.83 W1.5
SPI1_NSS: R15.1 U1.29 W1.1 | length 744.1
  Top Layer w6: U1.29 2389.76,2166.93 2424.41,2201.57 2424.41,2361.89 2448.35,2385.83 v2(2465.35,2385.83) ; R15.1 2686.15,2296.28 2700.89,2311.02 2724.41,2311.02 v2(2725.98,2312.6)
  Bottom Layer w6: v2(2465.35,2385.83) 2670.87,2385.83 2725.2,2331.5 v2@2725.2,2312.6
SPI1_SCK: U1.30 W1.6 | length 372
  Top Layer w6: U1.30 2387.4,2186.61 2412.57,2211.79 2412.57,2375.57 2447.83,2410.83 W1.6
SPI2_CS1: U1.81
SPI2_CS2: U1.78
SPI2_CS3: U1.79
SPI2_MISO: U1.53
SPI2_MOSI: U1.54
SPI2_NSS: U1.51
SPI2_SCK: U1.52
SWCLK: R16.1 U1.76 | length 162.6
  Top Layer w6: R16.1 1666.93,2708.66 1692.52,2683.07 U1.76
SWCLK_I: P7.3 R16.5 | length 843.2
  Bottom Layer w6: v2@1597.64,2708.66 1607.87,2698.43 2327.56,2698.43 2382.98,2753.85 P7.3
  other v2: 1598.43,2708.66
SWDIO: R16.2 U1.72 | length 245.1
  Top Layer w6: R16.2 1659.06,2688.98 1676.38,2671.65 1676.38,2620.47 v2(1674.02,2618.11)
  Bottom Layer w6: v2(1674.02,2618.11) 1779.53,2618.11 1807.87,2589.76 v2(1812.6,2589.76)
SWDIO_I: P7.1 R16.6 | length 943.6
  Top Layer w6: v2(1594.49,2685.04) 1609.37,2685.04 R16.6
  Bottom Layer w6: v2@1592.13,2687.43 2387.43,2687.43 2461.72,2761.72 P7.1
TIM1_CH1: R12.1 U1.40 | length 391.5
  Top Layer w6: U1.40 2322.83,2383.46 2344.88,2405.51 2344.88,2424.41 2478.74,2558.27 2478.74,2639.56 2494.49,2655.31 R12.1@2494.49,2668.04
TIM1_CH2: R12.2 U1.42 | length 342.7
  Top Layer w6: U1.42 2321.26,2422.83 2463.78,2565.35 2463.78,2644.49 2473.99,2654.69 R12.2
TIM1_CH3: R12.3 U1.44 | length 306.4
  Top Layer w6: U1.44 2340.42,2462.2 2449.34,2571.12 2449.34,2650.94 2454.3,2655.91 R12.3
TIM1_CH4: R12.4 U1.45 | length 278.3
  Top Layer w6: U1.45 2339.37,2481.89 2435.43,2577.95 R12.4@2435.43,2668.04
TIM3_CH1: U1.63
TIM3_CH3: U1.35
TIM3_CH4: U1.36
TIM4_CH1: R18.1 U1.59 | length 157.9
  Top Layer w6: R18.1@1967.72,2727.56 2018.9,2727.56 2068.5,2677.95 U1.59
TIM4_CH2: R18.2 U1.60 | length 164.2
  Top Layer w6: R18.2@1948.03,2725.98 1948.03,2717.32 1954.33,2711.02 2018.9,2711.02 2048.82,2681.1 U1.60
TIM4_CH3: R18.3 U1.61 | length 164.7
  Top Layer w6: R18.3@1928.35,2725.98 1928.35,2717.32 1946.46,2699.21 2011.81,2699.21 2029.13,2681.89 U1.61
TIM4_CH4: R18.4 U1.62 | length 164.2
  Top Layer w6: R18.4@1908.66,2725.98 1908.66,2717.32 1938.58,2687.4 2003.15,2687.4 2009.45,2681.1 U1.62
TIM5_CH3: R8.3 U1.25 | length 879.5
  Top Layer w6: U1.25 2225.98,2076.38 2235.43,2085.83 2275.58,2085.83 v2(2276.37,2085.04) ; v2(2511.02,2535.43) 2511.02,2601.52 2546.98,2637.48 2602.08,2637.48 2624.41,2659.81 R8.3@2624.41,2668.04
  Bottom Layer w6: v2(2276.37,2085.04) 2283.46,2077.95 2318.9,2077.95 2436.22,2195.28 2436.22,2462.2 2509.45,2535.43 v2(2511.02,2535.43)
TIM5_CH4: R8.4 U1.26 | length 757.9
  Top Layer w6: U1.26 2287.01,2104.33 v2@2300,2091.34 ; v2(2484.25,2535.43) 2495.28,2546.46 2495.28,2606.51 2541.52,2652.76 2594.72,2652.76 R8.4@2604.72,2662.76
  Bottom Layer w6: v2(2299.21,2096.06) 2318.9,2096.06 2424.41,2201.57 2424.41,2475.59 v2(2484.25,2535.43)
TIM8_CH3: R8.1 U1.65 | length 811.1
  Top Layer w6: v2(1950.39,2585.83) U1.65 ; v2(2537.01,2600.79) 2609.45,2600.79 2663.78,2655.12 R8.1@2663.78,2663.45
  Bottom Layer w6: v2(1950.39,2585.83) 1956.69,2579.53 2248.82,2579.53 2264.57,2595.28 2531.5,2595.28 v2(2537.01,2600.79)
TIM8_CH4: R8.2 U1.66 | length 850.3
  Top Layer w6: v2(1929.92,2573.22) 1929.92,2640.55 U1.66 ; v2(2554.33,2618.9) 2608.15,2618.9 2644.09,2654.84 R8.2@2644.09,2663.45
  Bottom Layer w6: v2(1929.92,2573.22) 1936.21,2566.93 2255.12,2566.93 2270.87,2582.68 2545.67,2582.68 2554.33,2591.34 v2(2554.33,2618.9) v2@2558.27,2618.9
TIM10_CH1: U1.95
USART1_RX: R9.4 U1.69 | length 1111.7
  Top Layer w6: v2(1871.65,2472.44) 1878.74,2479.53 1878.74,2601.57 1871.65,2608.66 U1.69 ; R9.4 2409.45,1948.03 v2@2415.75,1954.33
  Bottom Layer w6: v2(1871.65,2472.44) 2055.91,2472.44 2173.23,2355.12 2173.23,2091.34 2234.65,2029.92 2351.97,2029.92 2415.75,1966.14 v2(2415.75,1955.12)
USART1_RX_I: P2.4 pad.3 R9.8 | length 378.6
  Top Layer w6: R9.8 2409.45,1906.3 2417.32,1914.17 v2(2425.2,1914.17)
  Bottom Layer w6: v2(2425.2,1914.17) 2431.08,1908.29 2543.68,1908.29 2574.16,1877.81 ; P2.4 2574.16,1877.81 ; pad.3 2714.96,1903.94 2600.29,1903.94 2574.16,1877.81
USART1_TX: R9.3 U1.68 | length 1074.1
  Top Layer w6: v2@1891.34,2455.11 U1.68 ; R9.3 2389.76,1952.76 v2@2391.34,1954.33
  Bottom Layer w6: v2(1892.12,2455.11) 1898.43,2461.42 2049.61,2461.42 2162.23,2348.8 2162.23,2085.02 2228.32,2018.92 2337.77,2018.92 2391.86,1964.83 v2(2391.86,1955.12)
USART1_TX_I: P2.3 pad.2 R9.7 | length 433
  Top Layer w6: v2(2389.76,1894.49) R9.7
  Bottom Layer w6: v2(2389.76,1894.49) 2522.05,1894.49 2534.79,1881.74 P2.3 2534.79,1835.29 2556.69,1813.39 2594.49,1813.39 2645.41,1864.3 pad.2
USART2_RX: R9.1 U1.87 | length 999.2
  Top Layer w6: U1.87@1691.73,2361.42 1723.62,2361.42 1732.28,2370.08 1895.28,2370.08 v2@1903.94,2361.42 ; v2(2344.09,1955.12) 2350.39,1948.82 R9.1
  Bottom Layer w6: v2@1904.72,2363.78 1911.02,2357.48 2105.77,2357.48 2140.23,2323.03 2140.23,2072.37 2216.54,1996.06 2313.39,1996.06 2344.09,1965.35 v2(2344.09,1955.12)
  other v2: 1904.72,2360.63
USART2_RX_I: P3.4 R9.5 | length 203.8
  Top Layer w6: P3.4 2181.8,1872.35 2207.09,1897.64 2338.66,1897.64 R9.5
USART2_TX: R9.2 U1.86 | length 1018.5
  Top Layer w6: U1.86 v2@1914.96,2383.46 ; v2@2368.5,1955.12 2370.08,1953.54 R9.2
  Bottom Layer w6: v2@1916.54,2380.32 1925.2,2371.65 2107.87,2371.65 2151.23,2328.3 2151.23,2079.48 2222.79,2007.92 2325.94,2007.92 2367.98,1965.88 v2(2367.98,1955.12)
  other v2: 1914.96,2381.89
USART2_TX_I: P3.3 R9.6 | length 181.9
  Top Layer w6: P3.3 2221.17,1860.54 2246.46,1885.83 2354.63,1885.83 2370.08,1901.27 R9.6
USART3_RX_I: P4.4 R11.5 | length 61.2
  Bottom Layer w6: P4.4 2298.96,1888.73 2309.45,1899.21 R11.5
USART3_RX_SDA2: R11.1 U1.48 | length 836.9
  Top Layer w6: v2(2102.36,2324.41) 2109.45,2331.5 2109.45,2400.79 2249.61,2540.94 U1.48
  Bottom Layer w6: v2(2102.36,2324.41) 2111.02,2324.41 2129.23,2306.2 2129.23,2066.83 2211.02,1985.04 2289.76,1985.04 2309.45,1965.35 R11.1
USART3_TX_I: P4.3 R11.6 | length 52.8
  Bottom Layer w6: P4.3@2259.59,1869.04 2289.76,1899.21 R11.6
USART3_TX_SCL2: R11.2 U1.47 | length 796.5
  Top Layer w6: v2(2110.24,2299.21) 2122.05,2311.02 2122.05,2394.49 2248.82,2521.26 U1.47
  Bottom Layer w6: v2@2111.81,2300.79 2118.23,2294.37 2118.23,2060.68 2204.9,1974.02 2279.53,1974.02 2289.45,1964.09 2289.45,1939.68 R11.2
USART4_RX: R11.3 U1.24 | length 139
  Top Layer w6: U1.24 2206.3,2008.66 2259.06,1955.91 v2(2267.72,1955.91)
  Bottom Layer w6: v2(2267.72,1955.91) 2270.08,1953.54 R11.3
USART4_RX_I: P5.4 R11.7 | length 451
  Top Layer w6: P5.4 1906.6,1863.3 1951.97,1908.66 2174.8,1908.66 2202.36,1936.22 v2(2208.66,1936.22)
  Bottom Layer w6: v2(2208.66,1936.22) 2208.66,1912.6 2230.71,1890.55 2261.42,1890.55 2270.08,1899.21 R11.7
USART4_TX: R11.4 U1.23 | length 133.9
  Top Layer w6: U1.23 2186.61,2010.24 2236.22,1960.63 v2(2236.22,1953.54)
  Bottom Layer w6: v2(2236.22,1953.54) R11.4
USART4_TX_I: P5.3 R11.8 | length 348.4
  Top Layer w6: P5.3 1945.97,1879.83 1961.42,1895.28 2182.68,1895.28 2203.94,1916.54 v2(2233.86,1916.54)
  Bottom Layer w6: v2@2232.36,1909.37 R11.8
USART5_RX: R16.4 U1.83 | length 256.2
  Top Layer w6: R16.4 1632.28,2638.58 1632.28,2469.29 1659.05,2442.52 U1.83
USART5_RX_I: P1.5 R16.8 | length 100.3
  Top Layer w6: v2(1612.6,2549.61) 1612.6,2648.9 R16.8
USART5_TX: R16.3 U1.80 | length 226.8
  Top Layer w6: R16.3 1652.76,2669.29 1660.63,2661.42 1660.63,2638.58 1646.46,2624.41 1646.46,2511.02 1655.91,2501.57 U1.80
USART5_TX_I: P1.6 R16.7 | length 244.9
  Top Layer w6: R16.7 1601.57,2669.29 1592.13,2659.84 1592.13,2470.08 v2@1613.39,2448.82
  other v2: 1612.6,2448.82
USART_IMU_RX: P1.8 P6.4 | length 843.6
  Top Layer w6: v2(1612.6,2248.82) 1588.19,2224.41 1588.19,2016.54 1618.9,1985.83 1762.99,1985.83 1842.52,1906.3 1842.52,1841.73 1884.25,1800 v2(1965.35,1800)
  Bottom Layer w6: v2(1965.35,1800) 1999.21,1800 2023.77,1824.55 P6.4
USART_IMU_TX: P1.7 P6.3 | length 677.5
  Bottom Layer w6: P1.7 1666.14,2266.35 1666.14,2083.46 1863.78,1885.83 1977.95,1885.83 1984.4,1879.38 P6.3
VCC_2S~6S: D2.1 P13.1 P13.2 R2.2 | length 298.9
  Top Layer w6: R2.2 2710.56,2508.98 2878.74,2677.17 2878.74,2727.26
VCC_3.3V: C9.1 C10.1 C11.1 C12.1 C13.1 C14.1 P7.4 R10.2 R15.2 R24.2 T.C1.1 U1.6 U1.11 U1.19 U1.21 U1.22 U1.28 U1.50 U1.75 U1.100 U2.5 W1.3 W1.7 W1.8 | length 1211.8
  Top Layer w12.01: v1(1851.97,2118.9) 2136.22,2118.9 2147.24,2107.87 ; C13.1 2156.75,1974.34 2166.66,1984.25 U1.22@2166.66,2046.58 ; 2166.66,1997.64 2147.24,2017.06 U1.21 2147.24,2107.87 ; U1.28 2247.24,2147.24 2200,2100 2155.12,2100 2147.24,2107.87 ; C14.1@2439.58,2264.03 2469.39,2293.85 W1.7@2469.39,2354.53 ; W1.3 2715.16,2410.83 v1(2750.39,2375.59) 2750.39,2281.1 2732.29,2263 R15.2 ; v1(2721.26,2640.55) 2721.26,2655.59 2754.65,2688.98 R24.2
  Bottom Layer w12.01: v1@2266.14,2726.77 2319.68,2726.77 2343.61,2750.7 P7.4
  other v1: 3085.83,1802.36 3109.45,1802.36 3085.83,1862.2 3109.45,1862.2 1611.81,2110.24 2029.13,2118.9 2078.74,2118.9 2469.39,2335.83 2262.99,2646.46 1733.07,2663.78 2262.99,2726.77
VCC_5.0V: C2.1 C3.1 D1.2 P1.2 P2.1 P3.1 P4.1 P5.1 P6.1 P10.2 P11.2 P12.1 pad.0 RGB1.0 RGB1.1 RGB1.3 RGB1.5 U2.1 U2.3 USB1.1 | length 1001.7
  Top Layer w12.01: v1(2024.71,1759.54) P5.1 ; v1@2299.91,1760.54 P3.1 ; P11.2 2383.03,2816.18 2383.46,2815.75 v1(2401.57,2833.86) ; v1@2575.11,1761.11 P12.1
  Bottom Layer w12.01: v1@1905.66,1760.48 P6.1 ; v1@2180.85,1760.88 P4.1 ; v1(2456.05,1759.54) v1(2575.11,1759.54) 2625.8,1810.24 2662.99,1810.24 2710.24,1762.99 pad.0 ; v1@2456.05,1759.7 P2.1 ; v1(2840.16,2694.49) 2880.43,2734.76 USB1.1
  other v1: 1905.66,1759.54 2180.85,1759.54 2299.91,1759.54 3292.91,1982.68 3316.54,1982.68 3292.91,2006.3 3316.54,2006.3 2520.47,2048.03 2642.52,2048.03 2213.39,2307.09 2213.39,2330.71 2653.54,2833.86
VCC_IN: D2.2 T.C2.1 U3.7
pads on no net: U1.2 U1.3 U1.4 U1.5 U1.7 U1.8 U1.9 U1.15 U1.16 U1.17 U1.18 U1.33 U1.39 U1.41 U1.43 U1.46 U1.55 U1.56 U1.57 U1.58 U1.67 U1.70 U1.71 U1.77 U1.82 U1.84 U1.85 U1.89 U1.90 U1.91 U1.92 U1.93 U1.96 U3.2 U3.3 U3.5 USB1.4

## Polygon pours and split planes (outlines as drawn)
G on Top Layer "GND-No Net" (solid, remove dead copper, pour order 8): 1281.9,2959.77 1281.9,1635.77 1293.9,1623.77 3554.9,1623.77 3571.9,1640.77 3571.9,2938.77 3518.9,2991.77 1332.9,2991.77
G on Bottom Layer "GND-G" (solid, remove dead copper, pour order 7): 1316.59,2969.46 1316.59,1645.46 1328.59,1633.46 3589.59,1633.46 3606.59,1650.46 3606.59,2948.46 3553.59,3001.46 1367.59,3001.46
G on GND "GND-No Net" (solid, remove dead copper, pour order 6): 1497.64,2966.66 1497.64,1642.66 1509.64,1630.66 3770.64,1630.66 3787.64,1647.66 3787.64,2945.66 3734.64,2998.66 1548.64,2998.66
VCC_3.3V on VCC "GND-No Net" (solid, remove dead copper, pour order 5): 1345.79,2967.3 1345.79,1643.3 1357.79,1631.3 3618.79,1631.3 3635.79,1648.3 3635.79,2946.3 3582.79,2999.3 1396.79,2999.3

## Keep-outs
Keep-Out Layer:
  lines w10: 1574.8,1685.04 1602.36,1657.48 2663.39,1657.48 3313.39,1657.48 3346.46,1690.56 3346.46,2951.97 3318.11,2980.32 2257.87,2980.32 1601.57,2980.32 1574.8,2953.54 1574.8,2791.8 1574.8,1685.04

## Other copper
Top Layer:
  region net VCC_3.3V: 2262.99,2649.61 2262.99,2577.95 2274.02,2577.95 2274.02,2649.61
  region net BOOT1: 2338.58,2329.92 2338.58,2281.1 2349.61,2281.1 2349.61,2329.92
  region net BOOT1: 2349.61,2329.92 2278.74,2329.92 2278.74,2318.9 2349.61,2318.9
  region net SWDIO: 1807.09,2640.94 1807.09,2583.46 1818.11,2583.46 1818.11,2640.94
  region net VCC_3.3V: 2349.61,2152.76 2286.61,2152.76 2286.61,2141.73 2349.61,2141.73
  region net VCC_3.3V: 2102.36,2121.26 2102.36,2049.61 2113.39,2049.61 2113.39,2121.26
  region net VCC_3.3V: 1944.88,2121.26 1944.88,2049.61 1955.91,2049.61 1955.91,2121.26
  region net VCC_3.3V: 1846.46,2121.26 1846.46,2049.61 1857.48,2049.61 1857.48,2121.26
  region net NetC8_1: 2355.91,2566.14 2284.25,2566.14 2284.25,2555.12 2355.91,2555.12
  region net NetC7_1: 1798.43,2656.69 1798.43,2714.17 1787.4,2714.17 1787.4,2656.69
  region net VCC_3.3V: 1733.86,2667.72 1733.86,2712.6 1722.83,2712.6 1722.83,2667.72
  rectangle net VCC_3.3V: 1722.83,2667.72 1759.06,2678.74
  rectangle net BOOT0: 1622.83,2220.47 1694.49,2231.5
  rectangle net VCC_3.3V: 1605.51,2102.36 1677.17,2113.39
  region net G: 3169.29,1945.74 3169.29,1994.17 3132.28,1994.17 3132.28,1945.74
  region net NetC1_1: 3102.4,1908.74 3102.4,1957.16 3090.55,1957.16 3090.55,1908.74
  rectangle net VCC_3.3V: 3007.09,1786.61 3125.2,1875.59
  rectangle net G: 3176.38,1855.91 3297.64,1884.25
  rectangle net VCC_5.0V: 3134.65,1892.91 3222.05,1928.35
  rectangle net VCC_5.0V: 3134.65,1812.6 3170.87,1928.35
  rectangle net VCC_5.0V: 3134.65,1812.6 3220.47,1848.03
  rectangle net VCC_5.0V: 3195.28,1892.91 3256.69,1963.78
  rectangle net VCC_5.0V: 3222.83,1919.68 3335.43,2103.94
  region net NetR3_2: 3281.85,2195.2 3281.85,2146.78 3293.7,2146.78 3293.7,2195.2
  region net NetR3_2: 3293.7,2158.3 3254.65,2158.3 3254.65,2146.46 3293.7,2146.46
  region net NetR3_2: 3266.96,2121.33 3266.96,2158.27 3255.12,2158.27 3255.12,2121.33
  rectangle net NetR3_2: 3204.01,2123.59 3252.44,2135.43
  rectangle net NetD1_1: 3014.17,2066.14 3182.68,2155.12
  region net NetC4_1: 3029.92,2211.02 3029.92,2366.4 3014.17,2366.4 3014.17,2211.02
  rectangle net NetC4_1: 3014.17,2210.99 3086.09,2226.74
  rectangle net NetC4_2: 3066.93,2171.65 3144.35,2187.4
  rectangle net G: 3231.5,2320.47 3273.23,2648.82
  rectangle net G: 3060.63,2251.97 3333.07,2337.01
  rectangle net NetC4_1: 3014.17,2362.2 3051.18,2468.5
  rectangle net NetC4_1: 3014.17,2362.2 3155.12,2444.09
  rectangle net VCC_IN: 3164.57,2362.2 3219.68,2562.2
  rectangle net VCC_IN: 3062.2,2452.76 3171.65,2562.2
  rectangle net VCC_IN: 3122.05,2452.76 3219.68,2649.61
  rectangle net VCC_2S~6S: 2871.65,2722.05 2904.72,2733.28
  rectangle net VCC_2S~6S: 2871.65,2722.05 2883.46,2767.72
  rectangle net VCC_2S~6S: 2896.85,2641.73 3081.89,2685.83
  rectangle net VCC_2S~6S: 2896.85,2641.73 2942.52,2807.87
  rectangle net G: 2949.61,2694.68 3087.4,2807.87
  rectangle net R1: 2704.72,1970.08 2722.83,2052.76
  rectangle net R2: 2565.35,1970.08 2583.46,2052.76
  rectangle net R3: 2460.63,1970.08 2478.74,2052.76
  rectangle net G: 2337.8,2239.37 2374.02,2255.12
VCC:
  rectangle net VCC_5.0V: 2203.94,2290.55 2285.04,2347.24
  region net VCC_5.0V: 2324.41,2711.81 2285.04,2711.81 2285.04,2290.55 2324.41,2290.55
  region net VCC_5.0V: 2944.88,2672.44 2944.88,2711.81 2306.3,2711.81 2306.3,2672.44
  rectangle net VCC_5.0V: 2905.51,2576.38 2944.88,2711.81
  region net VCC_5.0V: 2937.01,2616.54 2937.01,2577.17 3224.41,2577.17 3224.41,2616.54
  region net VCC_5.0V: 3225.2,2617.32 3185.83,2617.32 3185.83,2047.24 3225.2,2047.24
  region net VCC_5.0V: 3260.63,2010.24 3260.63,2049.61 2517.32,2049.61 2517.32,2010.24
  region net VCC_5.0V: 3261.42,1738.58 3261.42,1777.95 1891.34,1777.95 1891.34,1738.58
  rectangle net VCC_5.0V: 3222.05,1738.58 3261.42,2119.68
  rectangle net VCC_3.3V: 3070.87,1788.19 3125.2,1877.17
  rectangle net VCC_5.0V: 3222.05,1966.14 3333.07,2119.68
  rectangle net VCC_5.0V: 2641.73,2698.43 2665.35,2834.65
  rectangle net VCC_5.0V: 2389.76,2699.21 2413.39,2835.43
Bottom Layer:
  rectangle net VCC_5.0V: 2201.57,2290.55 2361.42,2347.24
  rectangle net G: 2937.8,2048.03 3282.68,2115.75
  rectangle net NetD1_1: 3014.17,2133.86 3333.07,2281.1
  rectangle net NetC4_1: 3014.17,2361.42 3053.54,2470.87
  rectangle net NetC4_1: 3014.17,2403.15 3249.61,2470.87
  rectangle net VCC_3.3V: 2699.21,2633.07 2725.2,2648.82
  rectangle net VCC_5.0V: 2644.88,2794.49 2660.56,2835.43
  rectangle net R6: 2505.51,1940.94 2560.63,1967.32
  rectangle net R5: 2571.65,1940.94 2625.2,1967.32
  rectangle net R4: 2637.01,1940.94 2690.55,1967.32
  rectangle net VCC_5.0V: 2540.51,2087.4 2670.87,2177.28
  rectangle net VCC_5.0V: 2520.61,2036.22 2642.52,2059.84
  rectangle net G: 2201.57,2203.94 2367.72,2257.48

## Silkscreen, mask and mechanical layers (free items; w line width, h text height)
Top Overlay:
  region: 3101.57,2760.24 3101.57,2799.21 3037.57,2799.21 3037.57,2760.24
  rectangle: 3196.85,2600 3235.87,2664
  rectangle: 2425.72,1674.8 2604.72,1822.8
  rectangle: 2150.39,1674.8 2329.39,1822.8
  rectangle: 1876.38,1674.8 2055.38,1822.8
  rectangle: 2843.31,2814.2 3022.31,2962.2
  rectangle: 2311.81,2814.99 2730.18,2962.99
  lines w3.94: 1592.17,2778.69 1639.17,2778.69 1661.17,2800.69 ; 1670.08,2778.69 1710.17,2778.69 1732.17,2800.69 ; 1746.46,2778.69 1802.17,2778.69 1824.17,2800.69 ; 1826.77,2778.69 1892.17,2778.69 1914.17,2800.69
  lines w7.87: 3057.45,2349.05 3107.45,2349.05 ; 3114.13,2599.11 3114.13,2649.11 ; 3213.34,2052.12 3213.34,2102.12 ; 3061.45,2327.05 3104.45,2327.05 3082.95,2348.55 3061.45,2327.05 ; 3092.13,2602.11 3113.63,2623.61 3092.13,2645.11 3092.13,2602.11 ; 3191.34,2055.12 3212.84,2076.62 3191.34,2098.12 3191.34,2055.12
  lines w10: 2039.81,1885.04 2166.42,1885.04 ; 2307.87,1885.04 2432.28,1885.04 ; 2385.04,2017.32 2385.04,2673.23 ; 2405.51,2306.3 2405.51,2550.39 ; 2770.87,2303.15 2770.87,2662.2 ; 2792.13,1997.64 2792.13,2549.61 ; 2967.72,1753.54 2967.72,1972.44 ; 2981.1,2000.79 2981.1,2633.86 ; 2992.13,1754.33 3280.32,1754.33 ; 3007.09,2018.57 3335.43,2018.57 ; 2432.28,1885.04 2432.28,1958.27 2777.95,1958.27 2777.95,1885.04 2432.28,1885.04 ; 2148.03,2704.72 2148.03,2767.72 2325.98,2767.72 2325.98,2704.72 2148.03,2704.72 ; 2770.87,2657.48 3082.68,2657.48 3082.68,2718.11 2770.87,2718.11 2770.87,2657.48
  text "+" at 2818.11,2787.4 h39.37
  text "IO1 IO2 IO3 IO4" at 1884.25,2770.08 h50 r180
  text "S +  - -" at 2866.93,2722.83 h50
  text "M OUT" at 2158.27,2718.35 h60
  text "- +1 2 3 4 5 6 7 8" at 2333.86,2715.75 h60
  text "POW IN 3-6S" at 2779.53,2670.08 h60
  text "UART-4-2 | GRBV" at 2440.16,1907.09 h50
  text "R T G V" at 1899.21,1885.04 h50
  text "R T G V" at 2172.44,1885.04 h50
Bottom Overlay:
  circle w10: c2674.02,2029.13 r11.27
  region: 2945.14,2518.76 2945.14,2561.76 2859.14,2561.76 2859.14,2518.76
  region: 2868.14,2269.53 2825.14,2269.53 2825.14,2183.53 2868.14,2183.53
  region: 2604.28,1822.8 2425.28,1822.8 2425.28,1674.8 2604.28,1674.8
  region: 2329.45,1822.8 2150.45,1822.8 2150.45,1674.8 2329.45,1674.8
  region: 2055.12,1822.8 1876.12,1822.8 1876.12,1674.8 2055.12,1674.8
  region: 2724.41,2961.39 2579.41,2961.39 2579.41,2813.39 2724.41,2813.39
  region: 2490.93,2962.94 2311.93,2962.94 2311.93,2814.94 2490.93,2814.94
  lines w10: 2025.06,1885.83 2092.91,1885.83 ; 2236.22,1885.83 2444.88,1885.83 ; 2474.8,2751.97 2662.2,2751.97 ; 2499.21,2751.97 2486.61,2751.97 2486.61,2807.87 2596.85,2807.87 2596.85,2751.97 ; 2590.55,1885.83 2648.82,1885.83 2710.24,1947.24 2710.24,2031.5 3085.04,2031.5 3085.04,1964.57 ; 2710.24,1964.57 3085.04,1964.57 ; 2995.21,2035.5 2995.21,2636.22 ; 3293.7,1964.57 3085.04,1964.57 ; 2201.57,2751.97 2237.01,2751.97 2325.2,2751.97 2325.2,2807.71 2201.57,2807.71 2201.57,2751.97
  text "RC_IN" at 2316.54,2764.57 h50
  text "SWD" at 2587.4,2764.57 h50
  text "D G C V" at 2470.08,2725.98 h50
  text "G V S" at 2764.57,2725.98 h50
  text "凌霄" at 2850.14,2410.53 h210
  text "ANO-FC" at 2848.14,2280.53 h100
  text "UART-1-3 | IMU" at 3076.38,1979.53 h60
  text "R T G V" at 2018.9,1887.4 h50
  text "R T G V" at 2229.92,1887.4 h50
  text "R T G V" at 2582.68,1887.4 h50
Top Solder:
  text "匿名科创" at 2884.25,2118.9 h120 r90
  text "WWW.ANOTC.COM" at 2962.99,1979.53 h80 r90
Bottom Solder:
  text "ANOTC" at 2939.37,2492.91 h80 r90
  text "V1.2" at 2939.37,2240.94 h80 r90

## Text inside footprints (layer, text, board x,y; h text height)
P1: Bottom Overlay "LED" at 1704.23,1964.27 h86.61 r315
RGB1: Bottom Overlay "B" at 2660.51,2117.44 h19.68 r270; Bottom Overlay "R" at 2595.51,2117.44 h19.68 r270; Bottom Overlay "G" at 2530.51,2117.44 h19.68 r270